# Altium PCB Rajesh_Jasti_17978253_Lab1.PcbDoc
Units mil, origin at the board's own origin, x right, y up, seen from the top; angles counter-clockwise.
Board outline 1574.8 x 3856.47 mil, 2 copper layers (Top Layer, Bottom Layer); 21 components, 25 nets, 95 pads, 22 vias.
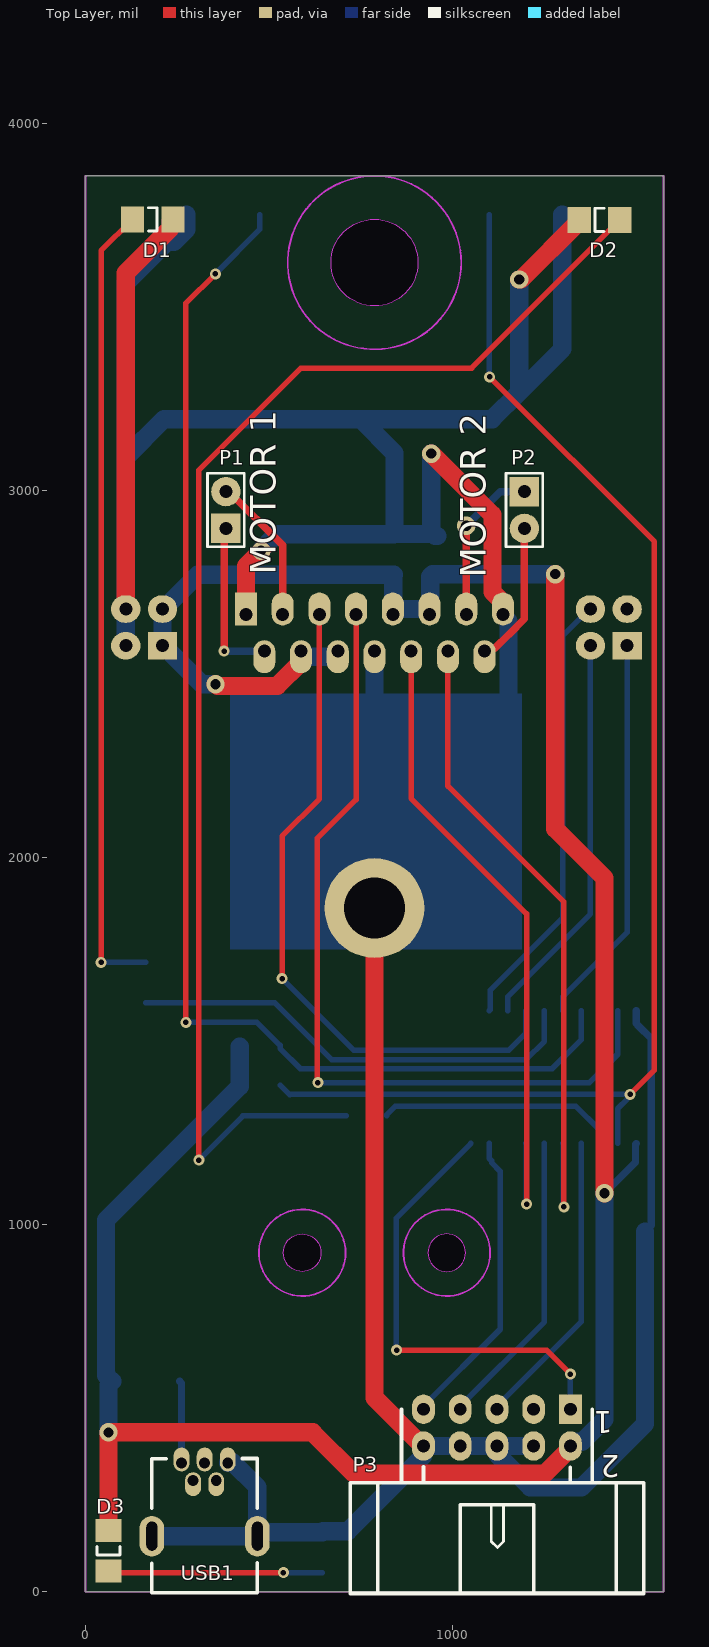
[diagram p0: Top Layer view]
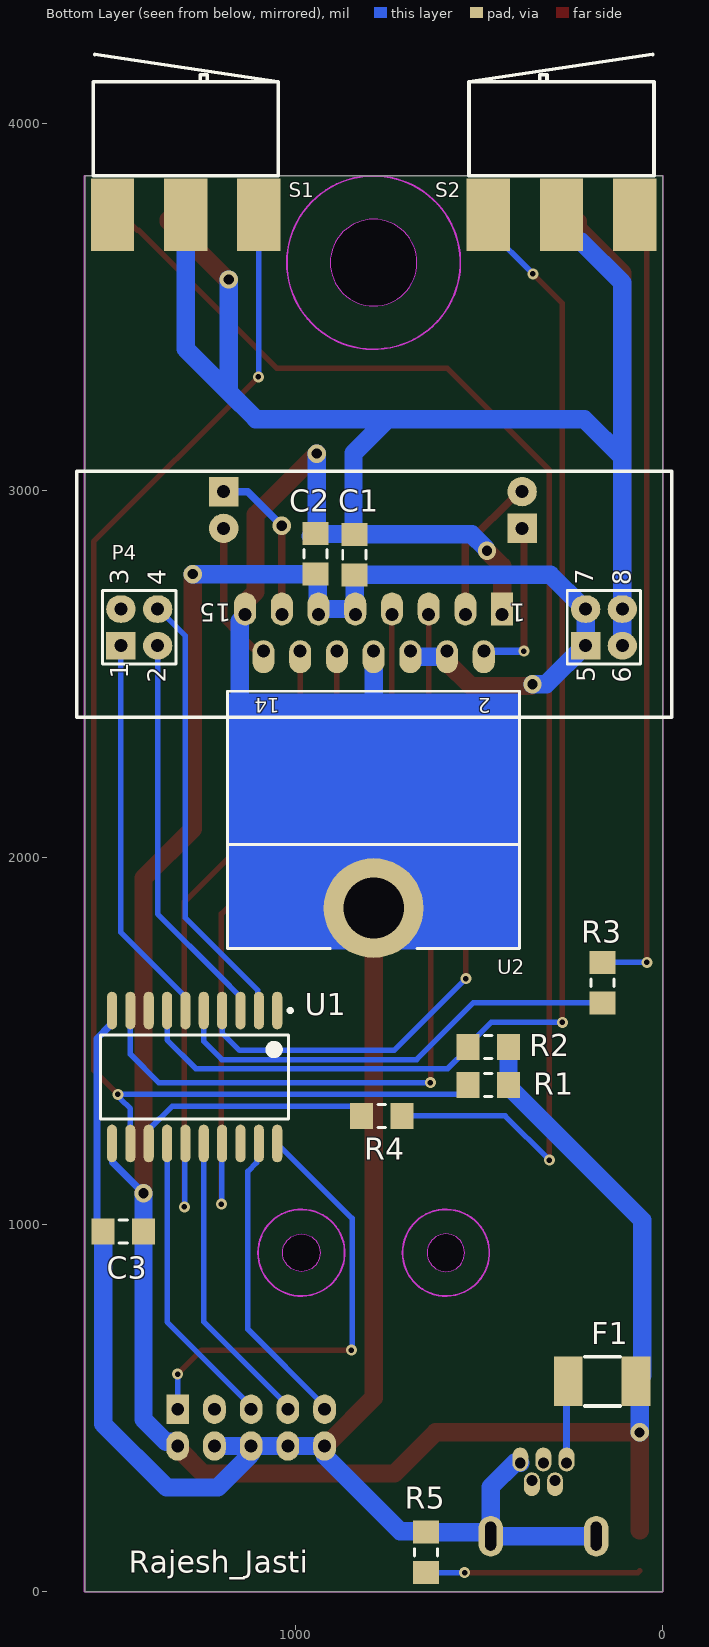
[diagram p1: Bottom Layer view, seen from below]

## Layer stack, top to bottom
Top Solder: solder mask 0.4, Solder Resist, Dk 3.5
Top Layer: signal copper 1.4
Dielectric1: dielectric 12.6, FR-4, Dk 4.8
Bottom Layer: signal copper 1.4
Bottom Solder: solder mask 0.4, Solder Resist, Dk 3.5

## Board outline
0,0 1574.8,0 1574.8,3856.47 0,3856.47
cut-out: 787.4,3502.14 cw(c787.4,3620.25) 669.29,3620.25 cw(c787.4,3620.25) 787.4,3738.36 cw(c787.4,3620.25) 905.51,3620.25 cw(c787.4,3620.25)
cut-out: 933.07,923.4 ccw(c984.25,923.4) 984.25,872.22 ccw(c984.25,923.4) 1035.43,923.4 ccw(c984.25,923.4) 984.25,974.58 ccw(c984.25,923.4)
cut-out: 590.55,872.22 cw(c590.55,923.4) 539.37,923.4 cw(c590.55,923.4) 590.55,974.58 cw(c590.55,923.4) 641.73,923.4 cw(c590.55,923.4)

## Design rules (kind name [scope] priority, off if disabled: settings)
Clearance Clearance_1 [InNamedPolygon('Top Layer-GND')] p1: gap=20 ignorepadtopadclearanceinfootprint=FALSE
Clearance [All] p2: gap=10 ignorepadtopadclearanceinfootprint=FALSE
ComponentClearance [All] p1 off: gap=10 collisioncheckmode=3 verticalgap=0 showdistances=FALSE
HoleSize [All] p1: absolutevalues=TRUE maxlimit=10000 minlimit=1 maxpercent=80.000 minpercent=20.000
MinimumSolderMaskSliver [All] p1 off: minsoldermaskwidth=10
PolygonConnect PolygonConnect_1 [All vs IsVia] p1: thpad.connectstyle=Relief thpad.reliefconductorwidth=10 thpad.reliefentries=4 thpad.polygonreliefangle="90 Angle" thpad.airgapwidth=10 smdpad.connectstyle=Relief smdpad.reliefconductorwidth=10 smdpad.reliefentries=4 smdpad.polygonreliefangle="90 Angle" smdpad.airgapwidth=10 via.connectstyle=Direct via.reliefconductorwidth=10 via.reliefentries=4 via.polygonreliefangle="90 Angle" via.airgapwidth=10
PolygonConnect [All] p2: connectstyle=Relief reliefconductorwidth=10 reliefentries=4 polygonreliefangle="90 Angle" airgapwidth=10
RoutingVias [All] p1: holewidth=15 width=30 viastyle="Through Hole" minholewidth=15 minwidth=30 maxholewidth=28 maxwidth=50
SilkToSilkClearance [All] p1 off: silktosilkclearance=10
SilkToSolderMaskClearance [IsPad] p1 off: minsilkscreentomaskgap=10 clearancetoexposedcopper=TRUE
SolderMaskExpansion [All] p1: expansion=4 istentingtop=FALSE
Width "Schematic Width Constraint_11" [InNet('NetP1_2')] p1: maxlimit=60 minlimit=20 preferedwidth=50
Width "Schematic Width Constraint_10" [InNet('NetP1_1')] p2: maxlimit=60 minlimit=20 preferedwidth=50
Width "Schematic Width Constraint_9" [InNet('GND')] p3: maxlimit=60 minlimit=20 preferedwidth=50
Width "Schematic Width Constraint_8" [InNet('NetF1_1')] p4: maxlimit=60 minlimit=20 preferedwidth=50
Width "Schematic Width Constraint_3" [InNet('NetP2_2')] p5: maxlimit=60 minlimit=20 preferedwidth=50
Width "Schematic Width Constraint_1" [InNet('NetP2_1')] p6: maxlimit=60 minlimit=20 preferedwidth=50
Width "Schematic Width Constraint" [InNet('+5')] p7: maxlimit=60 minlimit=20 preferedwidth=50
Width "Schematic Width Constraint_6" [InNet('NetP2_2')] p8: maxlimit=100 minlimit=50 preferedwidth=50
Width "Schematic Width Constraint_5" [InNet('NetP1_2')] p9: maxlimit=100 minlimit=50 preferedwidth=50
Width "Schematic Width Constraint_4" [InNet('NetP2_1')] p10: maxlimit=100 minlimit=50 preferedwidth=50
Width [All] p11: maxlimit=50 minlimit=15 preferedwidth=15
25 further rules are at their usual default settings.

## Components (designator, comment, footprint, x,y, rotation, side; value= is the part's Value field where it differs from the comment)
C1 "0.1uF" CAP_1206 840,2880 r270 bottom
C2 "0.1uF" CAP_1206 946,2882.02 r270 bottom
C3 "0.1uF" CAP_1206 1524.24,981 r180 bottom
D1 "LED-BLUE" LED1206B 128.1,3738.07 r0 top locked
D2 "LED-BLUE" LED1206B 1455.4,3736.67 r180 top locked
D3 "LED-BLUE" LED1206B 63,167 r270 top locked
F1 "MINIASMDC030F-2" MINIASMDC030F-2 257,573 r180 bottom
P1 "MOTOR_1" HDR1X2_AUT 382.8,2896.33 r90 top locked
P2 "MOTOR_2" HDR1X2_AUT 1195.7,2996.33 r270 top locked
P3 "Box Header 5X2/RA" FKV10SD_AUT 1321,497 r180 top locked
P4 "Line Following Board" "Line Folloing Board" 1475.63,2576.62 r180 bottom locked
R1 "330R" RES_1206 530.24,1380 r180 bottom
R2 "330R" RES_1206 530.24,1484 r180 bottom
R3 "330R" RES_1206 164,1603.76 r90 bottom
R4 "330R" RES_1206 820.24,1296 r180 bottom
R5 "120R" RES_1206 645,162.24 r270 bottom
S1 "SW0167" SW0167#1 1299.21,3856.47 r0 bottom locked
S2 "SW0167" SW0167#2 275.59,3856.47 r180 bottom locked
U1 "ATTINY1634-SU" 20S_M 1275,1402 r270 bottom
U2 "L298HN" Multiwatt15H 787.4,2261.98 r0 bottom locked
USB1 "MINI USB" USB-MINI-TH 324.87,350.24 r90 top locked

## Footprints (in the part's own frame and the unit in brackets; to place one, negate y for a bottom-side part, rotate by r counter-clockwise, add the part's x,y. Pads: shape width x height; smd on the part's side, far side on the other; paste and mask are expansions set on the pad)
20S_M [mm] "SOIC, 20-Leads, Body 12.8x7.5mm, Pitch 1.27mm, IPC Low Density"
  oval 2.6x0.7 smd: 1(-4.6,5.715) 2(-4.6,4.445) 3(-4.6,3.175) 4(-4.6,1.905) 5(-4.6,0.635) 6(-4.6,-0.635) 7(-4.6,-1.905) 8(-4.6,-3.175) 9(-4.6,-4.445) 10(-4.6,-5.715) 11(4.6,-5.715) 12(4.6,-4.445) 13(4.6,-3.175) 14(4.6,-1.905) 15(4.6,-0.635) 16(4.6,0.635) 17(4.6,1.905) 18(4.6,3.175) 19(4.6,4.445) 20(4.6,5.715)
  silkscreen extent -4.72,-6.5 2.9,6.74, body extent -5.28,-6.45 5.02,6.35, height 2.65
CAP_1206 [mm] "Body 3.2 x 1.6 mm (LxW typ)"
  rect 1.6x1.8 smd: 1(0,0) 2(2.8,0)
  silkscreen extent 1.1,-0.8 1.7,0.8, body extent -0.15,-0.81 3.05,0.79, height 1.6
FKV10SD_AUT [mil] "Box Headers; 10 Position; Dual Line; Right Angle; Pitch, 100 mil"
  rect 62x80 hole 35: 1(0,0)
  oval 62x80 hole 35: 2(0,100) 3(100,0) 4(100,100) 5(200,0) 6(200,100) 7(300,0) 8(300,100) 9(400,0) 10(400,100)
  silkscreen extent -200,0 600,502, body extent -200,-13 601,519, height 356
HDR1X2_AUT [mil] "Connector; Header; 2 Position; Pitch 2.54mm, Straight"
  rect 80x80 hole 35.43: 1(0,0)
  round 80 hole 35.43: 2(100,0)
  silkscreen extent -50,-50 150,50, body extent -48,-48 152,52, height 399
LED1206B [mm] "SMD; Blue LED; Body 3.2 x 1.6 mm"
  rect 1.6x1.8 smd: A(0,0) K(2.8,0)
  silkscreen extent 1.1,-0.8 1.7,0.8, body extent -0.2,-0.84 3,0.76, height 1.09
"Line Folloing Board" [mil] "2x 4 pins connectors to hold the Line following board"
  rect 80x75 hole 35.43: 1(0,0) 5(1265.63,0.01)
  oval 80x75 hole 35.43: 2(100,0) 3(0,100) 4(100,100) 6(1365.63,0.01) 7(1265.63,100.01) 8(1365.63,100.01)
  silkscreen extent -120,-195 1500,475, body extent -310,-195 1500,475, height 769
MINIASMDC030F-2 [mm] "MINIASMDC030F-2  FUSE, PTC RESET"
  rect 1.98x3.41 smd: 1(0,0) 2(4.68,0)
  silkscreen extent 1.12,-1.7 3.6,1.7, body extent -0.08,-1.67 4.62,1.53, height 0.43
Multiwatt15H [mm] "TO, Thru-Hole, Horizontal, Heatsink Mounted; 15 Bent Staggered Leads; Pitch 1.27 mm"
  rect 1.524x2.286 hole 0.9 copper offset 0,-0.381: 1(-8.89,-10.155)
  oval 1.524x2.286 hole 0.9 copper offset 0,0.381: 2(-7.62,-7.615) 4(-5.08,-7.615) 6(-2.54,-7.615) 8(0,-7.615) 10(2.54,-7.615) 12(5.08,-7.615) 14(7.62,-7.615)
  oval 1.524x2.286 hole 0.9 copper offset 0,-0.381: 3(-6.35,-10.155) 5(-3.81,-10.155) 7(-1.27,-10.155) 9(1.27,-10.155) 11(3.81,-10.155) 13(6.35,-10.155) 15(8.89,-10.155)
  round 6.9 hole 4.2: 16(0,10.155)
  silkscreen extent -10.1,-4.84 10.1,12.96, body extent -9.7,-10.5 9.9,13.1, height 5
RES_1206 [mm] "Body 3.2 x 1.6 mm (LxW typ)"
  rect 1.6x1.8 smd: 1(0,0) 2(2.8,0)
  silkscreen extent 1.14,-0.8 1.65,0.8, body extent -0.21,-0.8 2.96,0.75, height 0.6
SW0167#1 [mm]
  rect 3x5 smd: 1(-5.06,2.7) 2(0,2.7) 3(5.06,2.7)
  silkscreen extent -6.4,-8.4 6.4,0, body extent -6.37,-21.77 46.93,3.05, height 3.35
SW0167#2 [mm]
  rect 3x5 smd: 1(-5.06,-2.7) 2(0,-2.7) 3(5.06,-2.7)
  silkscreen extent -6.4,0 6.4,8.4, body extent -6.37,-3.05 46.93,21.77, height 3
USB-MINI-TH [mm] "MINI USB TYPE AB, RECEPTACLE, THROUGH HOLE"
  oval 1.65x1.1 hole 0.75 copper offset 0.25,0: 1(0,1.6) 3(0,0) 5(0,-1.6)
  oval 1.65x1.1 hole 0.75 copper offset -0.25,0: 2(-1.2,0.8) 4(-1.2,-0.8)
  oval 2.8x1.7 hole 0.75 slot 2 at 0 deg: 6(-5.05,-3.65) 7(-5.05,3.65)
  silkscreen extent -8.98,-3.65 0.32,3.65, body extent -8.85,-3.85 0.15,3.85, height 1.3

## Part data
C1 C2 C3: library part "CAPN 1206", "Non Polarized Capacitor, SMD, 1206"
D1 D2 D3: library part "SMD 1206 LED-BLUE", "BLUE  LED, Case 1206", Supplier Part Number 1=8529965, Supplier 1=Farnell
F1: "Fuse, PTC Reset, 300mA Hold, 600mA Tripping, 30v, SMD", Supplier Part Number 1=1876432, Supplier 1=Farnell
P1 P2: library part HDR1X2V, "Header, Plug, 2.54mm, 2 Pins, Straight", Supplier Part Number 1=2254030, Supplier 1=Farnell
P3: "Header, Box, 10 Way, 2.54mm, Right Angle", Supplier Part Number 1=1099245, Supplier 1=Farnell
P4: "Connectors for Line Followinf Board", Supplier Part Number 1=200-SSW10201FD, Supplier 1=Mouser
R1 R2 R3 R4 R5: library part "Resistor 1206", "Resistor, SMD, 1206"
S1 S2: "Micro Switch Miniature 12mm"
U1: "8-bit AVR Microcontroller, 1.8-5.5V, 4KB Flash, 256 Bytes EEPROM, 256 Bytes SRAM", Supplier Part Number 1=2443186, Supplier 1=Element14
U2: "Dual Full Bridge Driver, Horiz", Supplier Part Number 1=1366570, Supplier 1=Farnell
USB1: library part "USB-MINI-A/B TH", "MINI USB TYPE A/B, RECEPTACLE, THROUGH HOLE", Supplier Part Number 1=2172034-1-ND, Supplier 1=Digi-Key

## Via types
v1: diameter 30, hole 15, Top Layer to Bottom Layer, 14 vias
v2: diameter 50, hole 28, Top Layer to Bottom Layer, 8 vias

## Nets (pads, with @x,y where several pads share a name; then routed paths per layer and width w, separated by ;. In a path a pad name is that pad's centre, name@x,y a point inside that pad or via, vN(x,y) a via of type N, cw(c..) or ccw(c..) an arc to the next point about the centre after c; other vN are vias at no path point)
#MISO: P3.9 U1.19 | length 822.9
  Bottom Layer w15: P3.9 921,506 1130,715 1130,1145 1106.28,1168.72 1106.28,1173.82 1100,1180.1 U1.19
#MOSI: P3.1 U1.20 | length 1244
  Top Layer w15: v1(848,658) 1256,658 v1(1321,593)
  Bottom Layer w15: v1(848,658) 846.14,659.86 846.14,1017.04 U1.20 ; P3.1 v1(1321,593)
#PWM1: U1.4 U2.5 | length 1859.5
  Top Layer w15: v1(536,1670) 536,2057.95 637.4,2159.35 U2.5
  Bottom Layer w15: v1(536,1670) 731.5,1474.5 1152.5,1474.5 1200,1522 U1.4
#PWM2: U1.17 U2.10 | length 1801.8
  Top Layer w15: U2.10 887.4,2160.6 1202,1846 v1(1202,1056)
  Bottom Layer w15: U1.17 1201,1219.9 1201,1057 v1(1202,1056)
#R\E\S\E\T\: P3.5 U1.14 | length 818.8
  Bottom Layer w15: P3.5 1121,506 1350,735 U1.14
#SCK: P3.7 U1.16 | length 818.8
  Bottom Layer w15: P3.7 1021,506 1250,735 U1.16
"#Sensor C": P4.2 U1.3 | length 1087
  Bottom Layer w15: U1.3 1150,1620.5 1206.5,1677 1375.63,1846.13 P4.2
"#Sensor L": P4.4 U1.2 | length 1209.2
  Bottom Layer w15: U1.2 1102.4,1585.51 1102.4,1637.65 1300,1835.25 1300,2603.49 1373.13,2676.62 P4.4
"#Sensor R": P4.1 U1.6 | length 1077.5
  Top Layer w15: P4.1@1473.47,2562.9 P4.1@1481.41,2570.84
  Bottom Layer w15: U1.6 1300,1620.5 1475.63,1796.13 P4.1
+5: C1.2 C2.2 C3.2 D3.A F1.2 P3.2 P4.5 P4.7 R1.2 R2.2 U1.11 U2.4 U2.6 U2.9 U2.11 | length 7538.2
  Top Layer w50: D3.A v2(63,434) 618.99,434 730.99,322 1251.75,322 1321,391.25 P3.2 ; v2(354.5,2472) 359.71,2466.79 522.4,2466.79 587.4,2531.79 U2.4 ; v2(1280,2771.78) 1280,2077.63 1414,1943.63 v2(1414,1085)
  Bottom Layer w20: v2(1414,1085) 1498.55,1169.55 1498.55,1219.45 U1.11
  Bottom Layer w50: v2(63,434) 63,563.25 F1.2 56,589.75 56,1012.06 420,1376.06 R1.2 R2.2 ; v2@353.5,2471 v2(354.5,2472) 317.13,2472 212.5,2576.63 P4.5 P4.7 218.17,2684.8 220.67,2684.8 305.63,2769.76 C1.2 ; U2.4@592.02,2546.79 682.78,2546.79 687.4,2551.41 U2.6@689,2553 ; U2.9 837.4,2672.17 U2.9@838.7,2673.47 ; C1.2@838.7,2768.46 U2.9@838.7,2673.47 ; 1232,2771 1232.78,2771.78 v2(1280,2771.78) C2.2 945.81,2771.78 939.31,2765.29 939.31,2663.7 U2.11 937.4,2672.17 932.78,2676.79 842.02,2676.79 U2.9@838.7,2673.47 ; P3.2 1321,402.75 1326.54,408.3 1352.79,408.3 1414,469.5 C3.2 v2(1414,1085)
Dir1: U1.9 U2.7 | length 2286.8
  Top Layer w15: v1(633.11,1387) 632,1388.11 632,2052.38 737.4,2157.78 U2.7
  Bottom Layer w15: v1(633.11,1387) 1373,1387 1450,1464 U1.9
Dir2: U1.15 U2.12 | length 1818.7
  Top Layer w15: U2.12 987.4,2194.6 1303,1879 v1(1303,1048)
  Bottom Layer w15: U1.15 1301.5,1219.4 1301.5,1049.5 v1(1303,1048)
GND: C1.1 C2.1 C3.1 D1.K D2.K P3.4 P3.6 P3.8 P3.10 P4.6 P4.8 R5.1 S1.2 S2.2 U1.10 U2.1 U2.8 U2.15 U2.16 USB1.5 USB1.6 USB1.7 | length 12668.5
  Top Layer w50: P4.8 110,3592 231.84,3713.84 231.84,3731.57 D1.K ; U2.1 437.4,2793.79 v2(478.61,2835) ; U2.16 787.4,528.26 907.37,408.3 915.46,408.3 921,402.75 P3.10 ; v2(942,3100) 1109,2933 1109,2722.89 1137.4,2694.49 U2.15 ; v2(1182,3574) 1186.44,3574 1345.16,3732.73 D2.K
  Bottom Layer w20: U2.8@776.58,2561.79 U2.8 ; U1.10 1500,1547.75 1505.83,1541.92 1540.83,1506.92 1540.83,997.59 C3.1
  Bottom Layer w50: P4.6 P4.8 110,3090 ; USB1.7 USB1.6 ; S2.2 275.59,3710.8 241.54,3676.75 221.6,3676.75 110,3565.15 110,3090 ; USB1.5@388.35,350.73 389.04,351.42 402.58,351.42 468.57,285.43 USB1.6 ; v2@483,2843 520,2880 C1.1 C1.1@841.01,2881.01 ; U2.8 U2.16 1152.4,2227.18 1152.4,2644.08 1137.4,2659.08 U2.15 U2.15@1137.4,2694.49 ; v2(942,3100) 942,2886.02 C2.1 ; C2.1@958.69,2875.52 952.5,2875.52 947.01,2881.01 C1.1@841.01,2881.01 ; v2(1182,3574) 1182,3268 ; P3.4 P3.6 ; S1.2 1299.21,3385.21 1182,3268 ; C3.1 1524.24,457.24 1351,284 1212,284 1123.3,372.7 1123.3,394.7 P3.6 ; 110,3090 214,3194 749,3194 ; USB1.6 468.57,154.42 476.39,162.24 R5.1 647.88,165.12 715.12,165.12 918.7,368.7 918.7,394.7 P3.10 P3.8 P3.6 ; 749,3194 842.02,3100.98 842.02,2882.02 C1.1@841.01,2881.01 ; 749,3194 1108,3194 1182,3268
LED1: R3.1 U1.5 | length 1254.6
  Bottom Layer w15: R3.1 516.24,1603.76 670.5,1449.5 1200.67,1449.5 1250,1498.83 U1.5
LED2: R4.1 U1.13 | length 656.9
  Bottom Layer w15: R4.1 820.24,1299 844.23,1323 1335.3,1323 1400,1258.3 U1.13
NetD1_A: D1.A R3.2 | length 2180.3
  Top Layer w15: v1(43,1714) 43,3652.97 D1.A
  Bottom Layer w15: v1(43,1714) R3.2
NetD2_A: D2.A R4.2 | length 3761.1
  Top Layer w15: v1(308.87,1175.88) 308.87,1186.49 309,1186.62 309,3055 587,3333 1051.73,3333 1427.47,3708.73 1431.4,3708.73 1455.4,3732.73 D2.A
  Bottom Layer w15: v1(308.87,1175.88) 428.99,1296 R4.2
NetD3_K: D3.K R5.2 | length 584
  Top Layer w15: D3.K 67.76,52 v1(539.37,52)
  Bottom Layer w15: v1(539.37,52) R5.2
NetF1_1: F1.1 USB1.1 | length 224.8
  Bottom Layer w20: F1.1 261.87,568.13 USB1.1
NetP1_1: P1.1 U2.2 | length 453.2
  Top Layer w20: v1(378,2561.79) 378,2891.53 P1.1
  Bottom Layer w20: v1(378,2561.79) 469.83,2561.79 478.61,2553 U2.2
NetP1_2: P1.2 U2.3 | length 403.4
  Top Layer w20: P1.2 391.08,2996.33 537.4,2850.01 U2.3
NetP2_1: P2.1 U2.13 | length 440.5
  Top Layer w20: v2@1036,2905 v2(1037.4,2903.6) U2.13
  Bottom Layer w20: v2(1037.4,2903.6) 1130.13,2996.33 P2.1
NetP2_2: P2.2 U2.14 | length 391.5
  Top Layer w20: U2.14 1095.06,2569.44 1115.44,2569.44 1153.96,2607.96 1154.29,2607.96 1195.7,2649.38 P2.2
SW1: R1.1 S1.1 U1.12 | length 3722.7
  Top Layer w15: v1(1101.17,3308.83) 1550,2860 1550,1420.5 v1(1484,1354.5)
  Bottom Layer w15: R1.1 557.24,1353 558.74,1354.5 v1(1484,1354.5) 1484,1350.44 1476.5,1342.94 1476.5,1342.5 1450,1316 U1.12 ; S1.1 1100,3310 v1(1101.17,3308.83)
SW2: R2.1 S2.1 U1.7 | length 3528.7
  Top Layer w15: v1(273.5,1551) 274,1551.5 274,3509.81 v1(353.87,3589.68)
  Bottom Layer w15: v1(273.5,1551) 467.17,1551 530.24,1487.94 R2.1 530.24,1480.06 585.8,1424.5 1271.5,1424.5 1350,1503 U1.7 ; v1(353.87,3589.68) 353.87,3589.87 474.8,3710.8 S2.1
pads on no net: P3.3 P4.3 S1.3 S2.3 U1.1 U1.8 U1.18 USB1.2 USB1.3 USB1.4
copper on no net: | length 35.2
  Top Layer w20: 1475.63,2676.62 1505.01,2676.62
  Bottom Layer w20: 1475.63,2676.62 1481.41,2676.62

## Polygon pours and split planes (outlines as drawn)
GND on Top Layer "Top Layer-GND 1" (solid, pour order 4): 605,2966.63

## Keep-outs
Keep-Out Layer:
  circle w5: c787.4,3620.25 r236.22
  circle w5: c984.25,923.4 r118.11
  circle w5: c590.55,923.4 r118.11
  lines w5: 0,3856.47 0,0 1574.8,0 1574.8,3856.47

## Other copper
Bottom Layer:
  rectangle net GND: 394,1749 1189,2447

## Silkscreen, mask and mechanical layers (free items; w line width, h text height)
Top Overlay:
  text "MOTOR 1" at 541.7,2770.53 h120 r90
  text "MOTOR 2" at 1114,2762.23 h120 r90
Bottom Overlay:
  text "Rajesh_Jasti" at 1454.84,51.99 h60
Bottom Solder:
  rectangle: 390,1756.63 1190,2421.63
Mechanical 1:
  circle w5: c787.4,3620.25 r118.11
  circle w5: c984.25,923.4 r51.18
  circle w5: c590.55,923.4 r51.18
  lines w5: 0,0 0,3856.47 1574.8,3856.47 1574.8,0 0,0

## Text inside footprints (layer, text, board x,y; h text height)
P3: Top Overlay "2" at 1456,372 h60 r180; Top Overlay "1" at 1436,492 h60 r180
P4: Bottom Overlay "1" at 1455.35,2487.06 h50 r270; Bottom Overlay "2" at 1352.99,2476.23 h50 r270; Bottom Overlay "4" at 1352.99,2741.62 h50 r270; Bottom Overlay "3" at 1455.35,2742.96 h50 r270; Bottom Overlay "5" at 185.63,2476.62 h50 r270; Bottom Overlay "6" at 87.36,2476.24 h50 r270; Bottom Overlay "8" at 87.36,2741.63 h50 r270; Bottom Overlay "7" at 189.72,2742.97 h50 r270
U2: Bottom Overlay "2" at 467.72,2434.03 h40 r180; Bottom Overlay "14" at 1043.11,2434.03 h40 r180; Bottom Overlay "15" at 1175,2691.31 h50 r180; Bottom Overlay "1" at 373.43,2691.31 h50 r180